# Altium PCB CamBienGiaToc.PcbDoc
Units mm, origin at the board's own origin, x right, y up, seen from the top; angles counter-clockwise.
Board outline 40 x 40 mm, 4 copper layers (Top Layer, Internal Plane 1, Internal Plane 2, Bottom Layer), stack 0.462 mm thick; 15 components, 11 nets, 46 pads, 16 vias.
Unrouted connection lines stored in the file: 26.
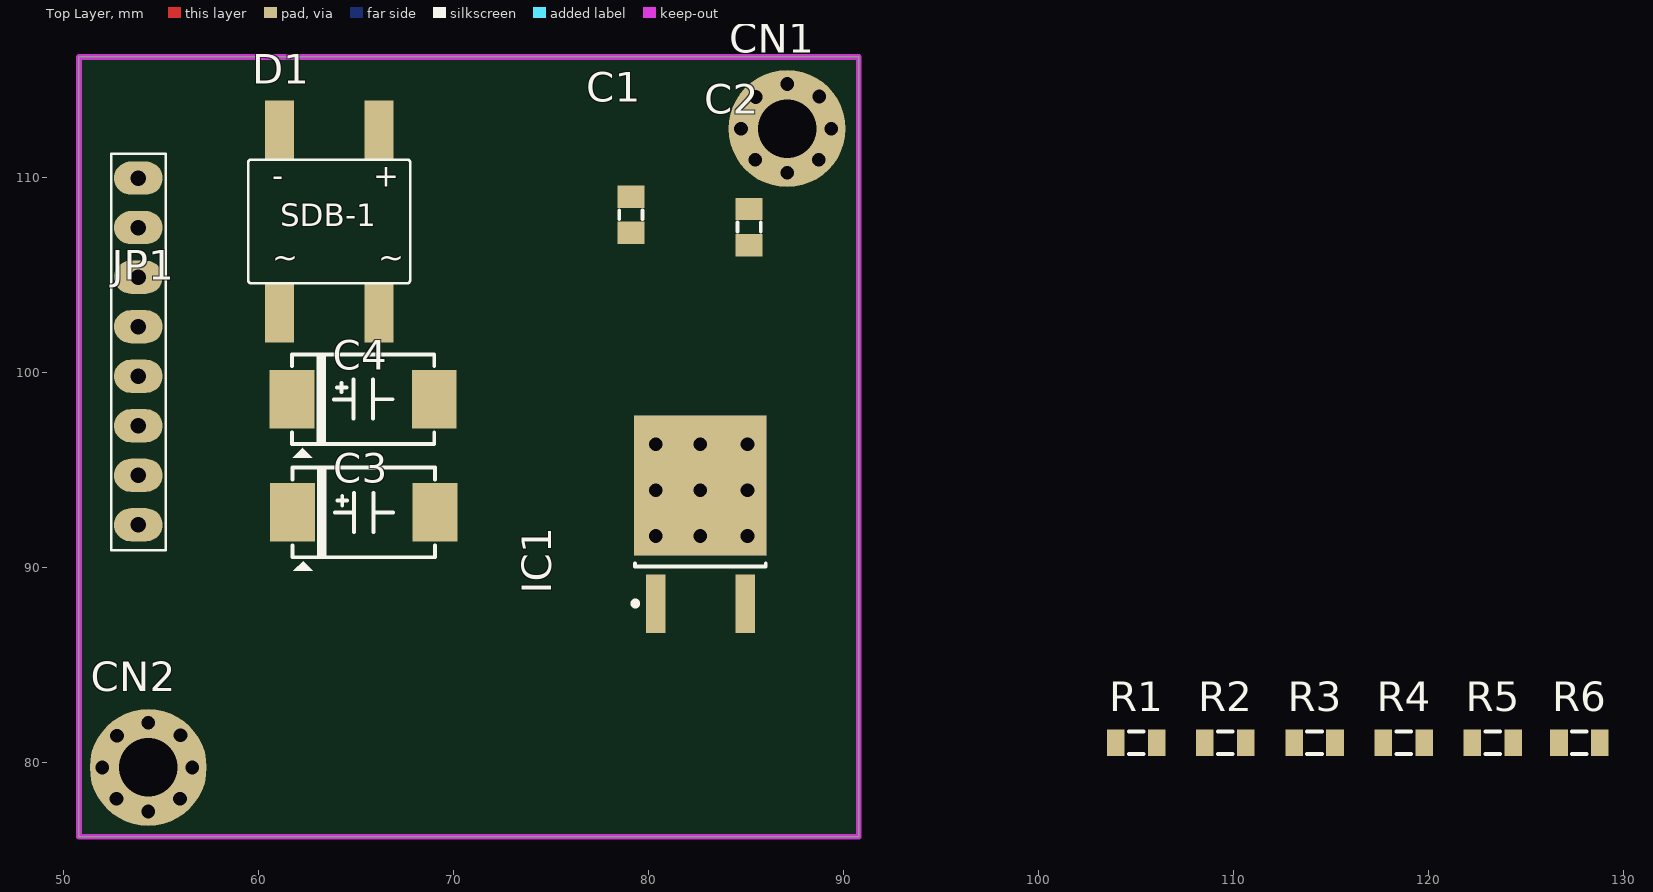
[diagram p0: Top Layer view]
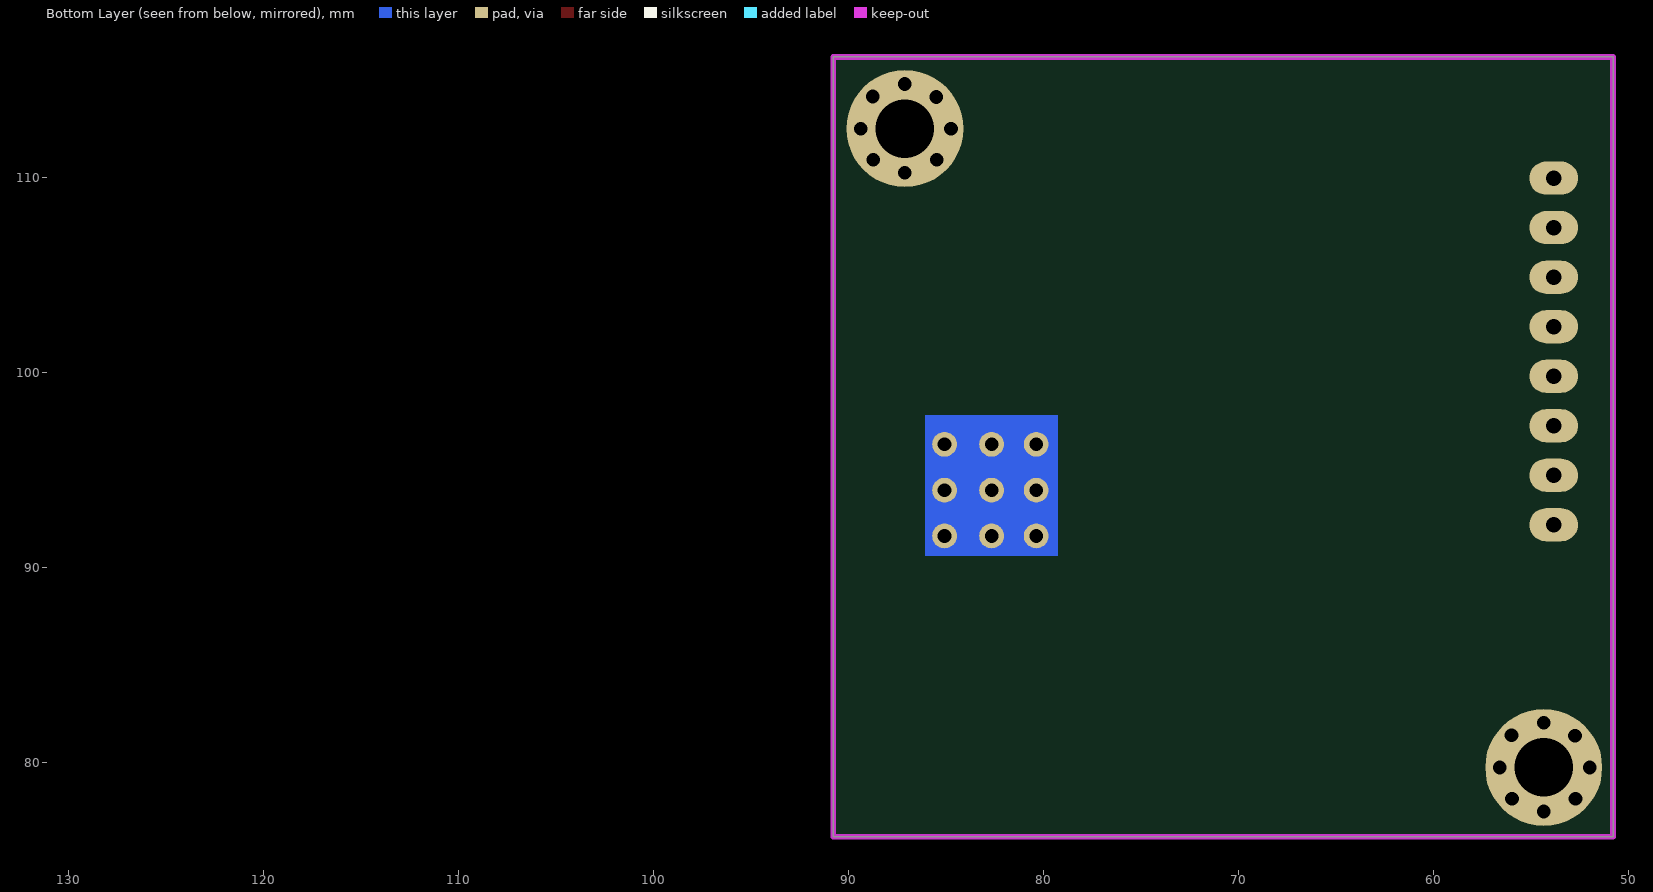
[diagram p1: Bottom Layer view, seen from below]
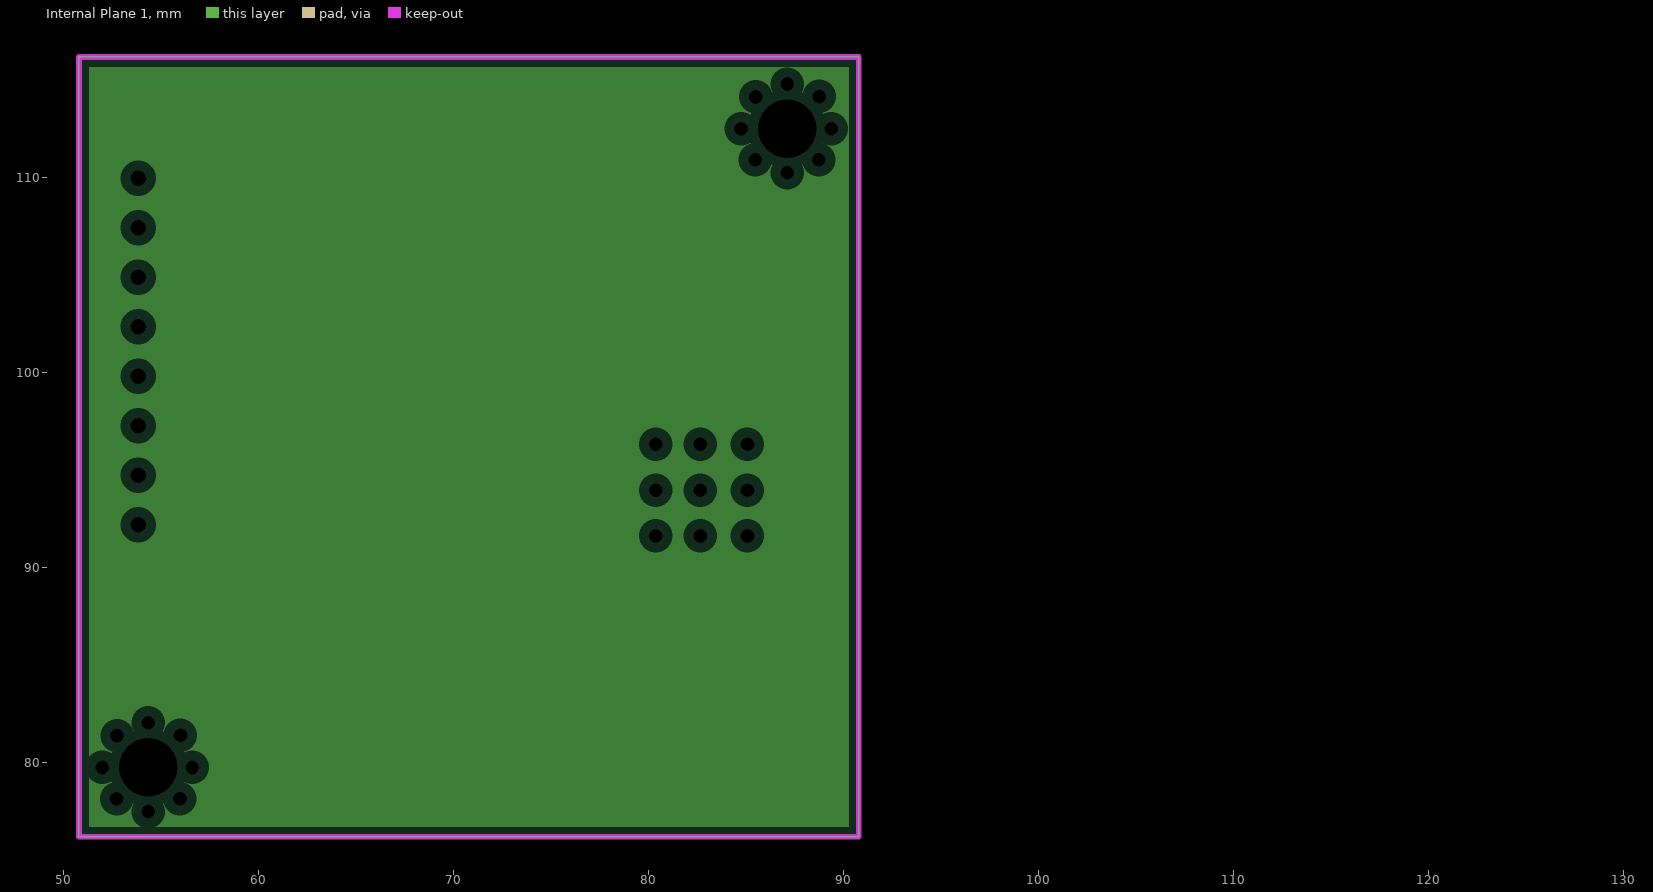
[diagram p2: Internal Plane 1, clearances drawn from the general rule]
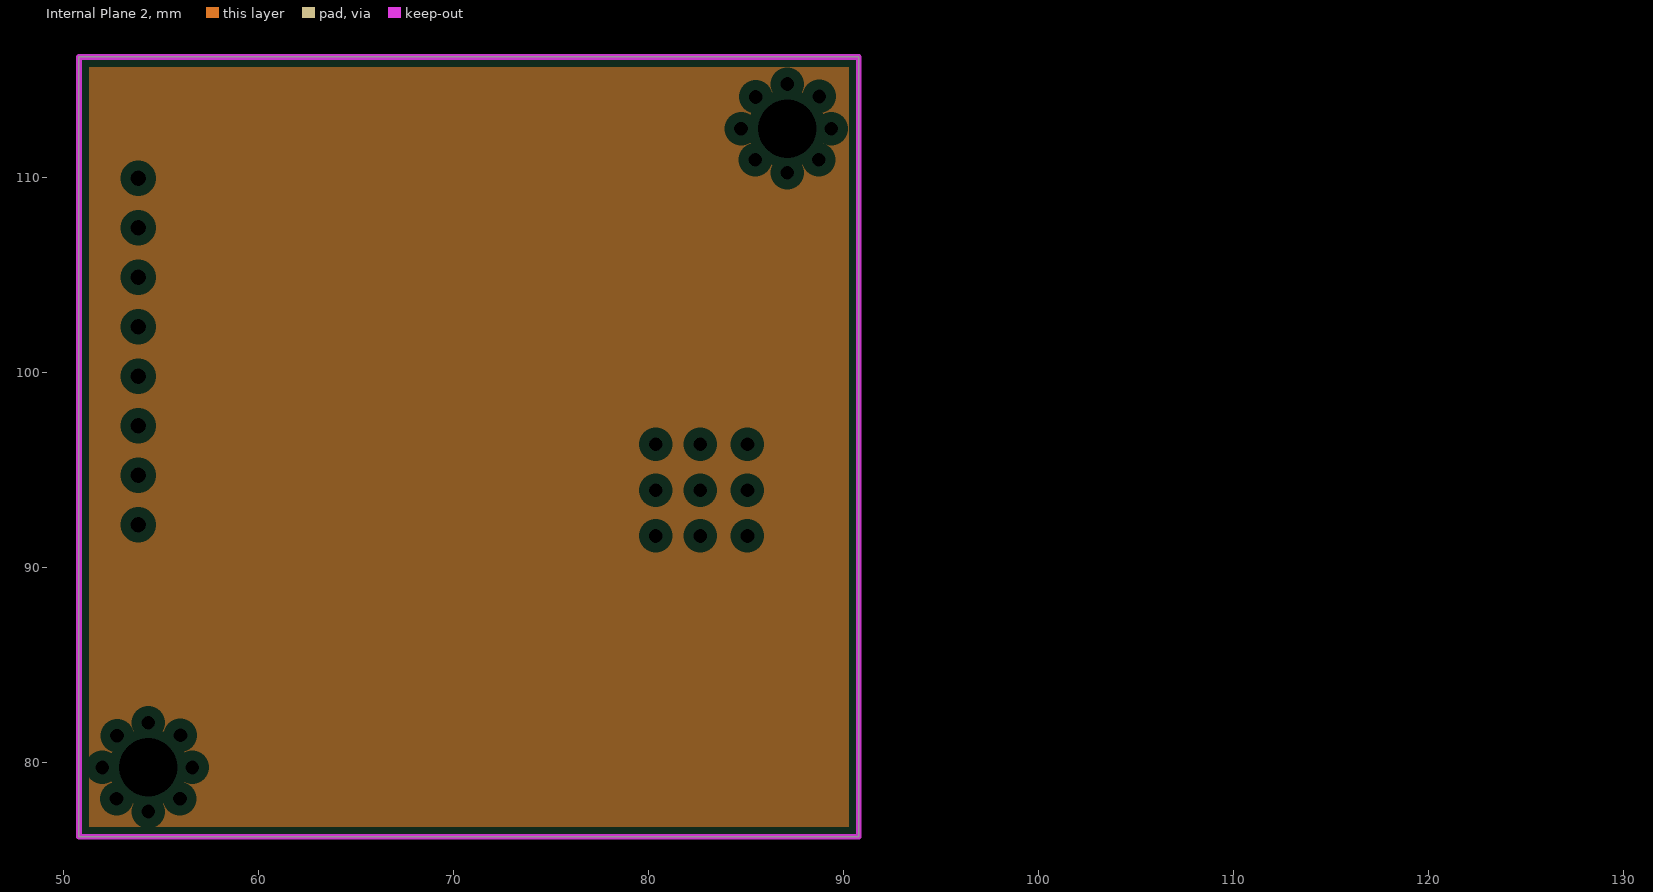
[diagram p3: Internal Plane 2, clearances drawn from the general rule]

## Layer stack, top to bottom
Top Solder: solder mask 0.0102, Solder Resist, Dk 3.5
Top Layer: signal copper 0.0356
Internal Plane 1: plane copper 0.0356
Internal Plane 2: plane copper 0.0356
Dielectric 1: dielectric 0.32, FR-4, Dk 4.8
Bottom Layer: signal copper 0.0356
Bottom Solder: solder mask 0.0102, Solder Resist, Dk 3.5

## Board outline
50.8,76.2 90.8,76.2 90.8,116.2 50.8,116.2

## Design rules (kind name [scope] priority, off if disabled: settings)
Clearance [All] p1: gap=0.2
PlaneClearance [All] p1: clearance=0.508
PlaneConnect [All] p1: planeconnectstyle=Relief reliefexpansion=0.508 reliefentries=4 reliefconductorwidth=0.254 reliefairgap=0.254
PolygonConnect [All] p1: connectstyle=Relief reliefconductorwidth=0.254 reliefentries=4 polygonreliefangle="90 Angle" airgapwidth=0.254
RoutingVias [All] p1: holewidth=0.6 width=1 viastyle="Through Hole" minholewidth=0.711 minwidth=1.27 maxholewidth=0.711 maxwidth=1.27
SolderMaskExpansion [All] p1: expansion=0.102
Width [All] p1: maxlimit=0.2 minlimit=0.2 preferedwidth=0.2
28 further rules are at their usual default settings.

## Components (designator, comment, footprint, x,y, rotation, side; value= is the part's Value field where it differs from the comment)
C1 "104" C-0805 79.113,108.107 r90 top
C2 "104" C-0805 85.171,107.474 r90 top
C3 "10uF" C-TANT-7343-31-CASEA 65.405,92.837 r0 top
C4 "10uF" C-TANT-7343-31-CASEA 65.377,98.641 r0 top
CN1 "COCDONGM3" M3 87.122,112.522 r0 top
CN2 "COCDONGM3" M3 54.356,79.756 r0 top
D1 "DB 1A" D-DB-1A-SMD 63.637,107.76 r0 top
IC1 "ASM1117" TO-252 82.677,92.266 r90 top
JP1 "CN-MPU6050" JP8 53.848,92.202 r90 top
R1 "10K" R-0805 105.029,81.026 r0 top
R2 "10K" R-0805 109.601,81.026 r0 top
R3 "10K" R-0805 114.173,81.026 r0 top
R4 "10K" R-0805 118.745,81.026 r0 top
R5 "10K" R-0805 123.317,81.026 r0 top
R6 "10K" R-0805 127.762,81.026 r0 top

## Footprints (in the part's own frame and the unit in brackets; to place one, negate y for a bottom-side part, rotate by r counter-clockwise, add the part's x,y. Pads: shape width x height; smd on the part's side, far side on the other; paste and mask are expansions set on the pad)
C-0805 [mm] "Chip Capacitor, 2-Leads, Body 2.0x1.3mm, IPC Medium Density"
  rect 1.15x1.4 smd: 1(-0.925,0) 2(0.925,0)
  silkscreen extent -0.22,-0.6 0.23,0.6, body extent -1,-0.63 1,0.63, height 0.5
C-TANT-7343-31-CASEA [mm] "Tantalium Capacitor 7343-31"
  rect 2.3x3 smd: 1(-3.65,0) 2(3.65,0)
  silkscreen extent -3.65,-3 3.65,2.3, body extent -3.8,-2.3 3.8,2.3, height 3.1
D-DB-1A-SMD [mm] "DB106S"
  rect 1.5x3 smd: 1(-2.55,-4.713) 2(2.55,-4.713) 3(2.55,4.713) 4(-2.55,4.713)
  silkscreen extent -4.15,-3.18 4.15,3.18, body extent -4.15,-4.95 4.15,4.95, height 3.35
JP8 [mm]
  oval 1.7x2.5 hole 0.8: 1(0,0) 2(2.54,0) 3(5.08,0) 4(7.62,0) 5(10.16,0) 6(12.7,0) 7(15.24,0) 8(17.78,0)
  silkscreen extent -1.3,-1.4 19.02,1.4, body extent -1.3,-1.3 19.02,1.24, height 8.5
M3 [mm]
  round 6 hole 3: 1(0,0)
R-0805 [mm] "Chip Resistor, 2-Leads, Body 2.0x1.3mm, IPC Medium Density"
  rect 0.9x1.35 smd: 1(-1.05,0) 2(1.05,0)
  silkscreen extent -0.38,-0.58 0.38,0.58, body extent -1,-0.63 1,0.63, height 0.5
TO-252 [mm] "AMS1117"
  rect 3x1 smd: 1(-4.1,2.29) 3(-4.1,-2.29)
  round 1.27 hole 0.7: 2(-0.635,2.286) 2(-0.635,0) 2(-0.635,-2.413) 2(1.714,-2.413) 2(1.714,0) 2(1.714,2.286) 2(4.064,-2.413) 2(4.064,0) 2(4.064,2.286)
  rect 7.2x6.8 smd: 2(1.95,0)
  Bottom Layer region: -1.651,3.404 5.563,3.404 5.563,-3.404 -1.626,-3.404 -1.651,-3.404 -1.651,-3.378
  silkscreen extent -4.22,-3.35 -2.05,3.46, body extent -4.55,-3.38 5.36,3.38, height 2.39

## Part data
C1 C2: library part CN
C3 C4: library part CP1, "Cap P  0,1uF < 22uF , 16 - 50V"
D1: library part DB
IC1: library part LM78xx, "On ap +, from + 5 to + 24VDC"
JP1: library part JP8
R1 R2 R3 R4 R5 R6: library part R, "Resistor 1/4W"

## Via types
v1: diameter 1, hole 0.7, Top Layer to Bottom Layer, 16 vias

## Nets (pads, with @x,y where several pads share a name; then routed paths per layer and width w, separated by ;. In a path a pad name is that pad's centre, name@x,y a point inside that pad or via, vN(x,y) a via of type N, cw(c..) or ccw(c..) an arc to the next point about the centre after c; other vN are vias at no path point)
+5V: C2.2 C4.1 IC1.3 JP1.8 R1.2 R2.2 R3.2 R4.2 R5.2 R6.2
+12V: C1.2 C3.1 D1.3 IC1.1
AD0: JP1.5 R2.1
GND: C1.1 C2.1 C3.2 C4.2 D1.4 IC1.2 JP1.7
INT: JP1.6 R1.1
NetCN1_1: CN1.1 D1.1
  other v1: 87.122,110.261 85.496,110.922 88.748,110.922 84.76,112.522 89.383,112.522 85.522,114.148 88.773,114.173 87.122,114.808
NetCN2_1: CN2.1 D1.2
  other v1: 54.356,77.495 52.73,78.156 55.982,78.156 51.994,79.756 56.617,79.756 52.756,81.382 56.007,81.407 54.356,82.042
SCL: JP1.1 R6.1
SDA: JP1.2 R5.1
XCL: JP1.4 R3.1
XDA: JP1.3 R4.1

## Keep-outs
Keep-Out Layer:
  the board outline again, w0.3

## Dimensions
50.8,76.2 to 90.8,76.2 on Mechanical 1
50.8,76.2 to 50.8,116.2 on Mechanical 1

## Text inside footprints (layer, text, board x,y; h text height)
D1: Top Overlay "~        ~" at 60.716,104.966 h2; Top Overlay "-         +" at 60.716,109.157 h2; Top Overlay "SDB-1" at 61.129,107.12 h2